# Altium PCB wizip20-io-v100.PcbDoc
Units mm, origin at the board's own origin, x right, y up, seen from the top; angles counter-clockwise.
Board outline 25.4 x 57.15 mm, 2 copper layers (Top Layer, Bottom Layer); 23 components, 24 nets, 91 pads, 53 vias.
Unrouted connection lines stored in the file: 9.
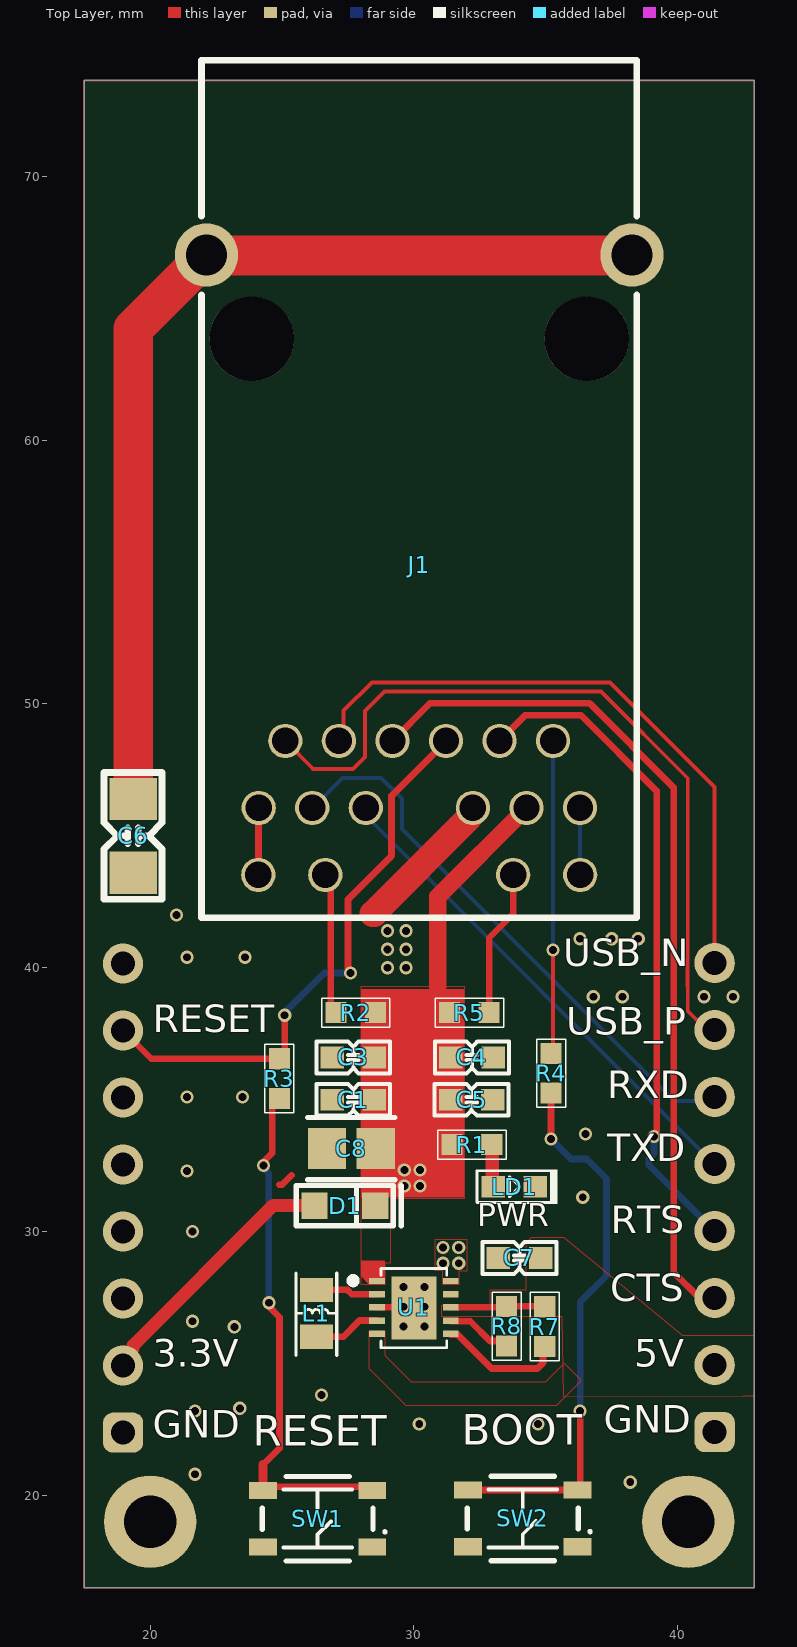
[diagram p0: Top Layer view]
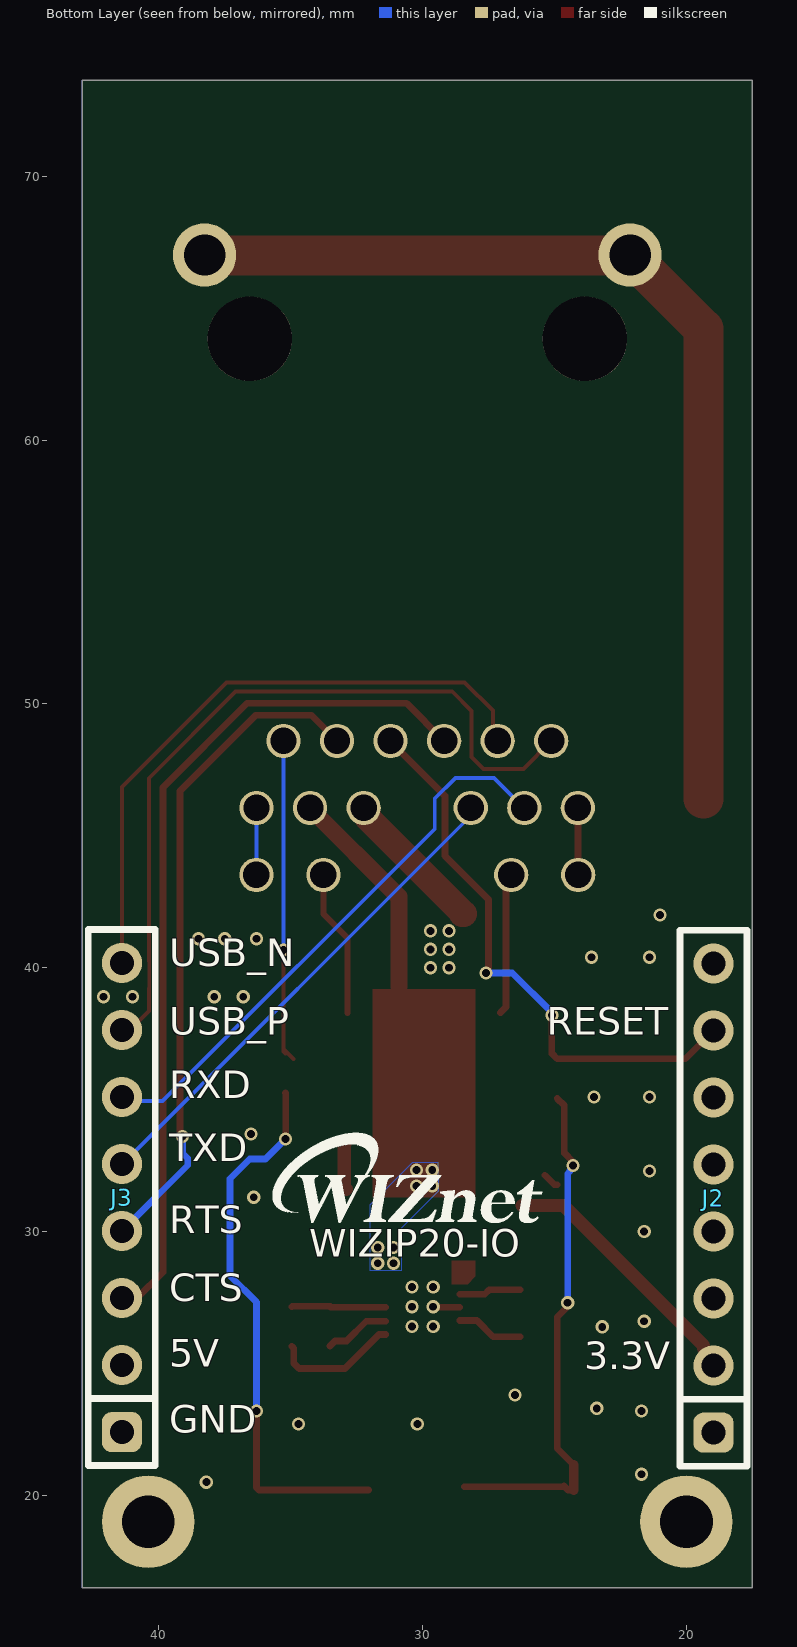
[diagram p1: Bottom Layer view, seen from below]
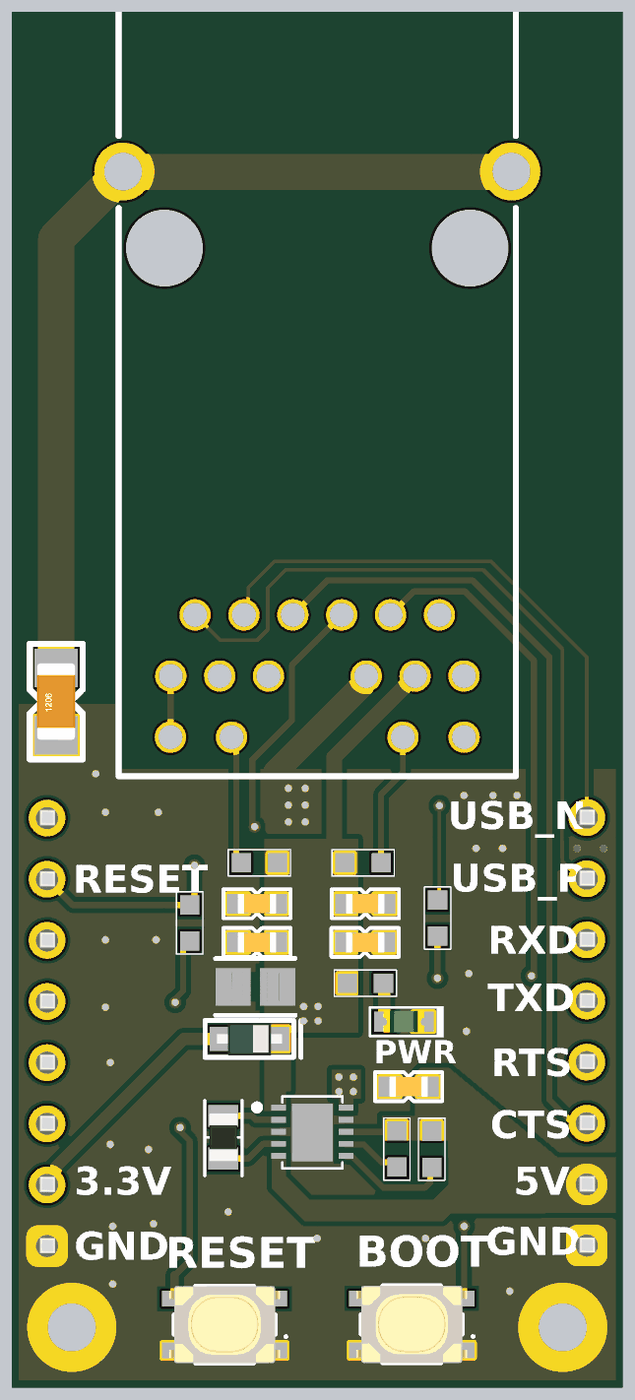
[diagram p2: 3D render of the assembled board from above, using the file's embedded part models]

## Layer stack, top to bottom
Top Solder: solder mask 0.0102, Solder Resist, Dk 3.5
Top Layer: signal copper 0.0356
Dielectric 1: dielectric 0.32, FR-4, Dk 4.8
Bottom Layer: signal copper 0.0356
Bottom Solder: solder mask 0.0102, Solder Resist, Dk 3.5

## Board outline
17.5,16.5 17.5,73.65 42.9,73.65 42.9,16.5

## Design rules (kind name [scope] priority, off if disabled: settings)
BoardOutlineClearance [All] p1: gap=0.3 ignorepadtopadclearanceinfootprint=FALSE except(0: Track-OutlineEdge)
Clearance [All] p1: gap=0.2 ignorepadtopadclearanceinfootprint=FALSE
HoleSize [All] p1: absolutevalues=TRUE maxlimit=3.3 minlimit=0.025 maxpercent=80.000 minpercent=20.000
PlaneConnect [All] p1: planeconnectstyle=Direct reliefexpansion=0.508 reliefentries=4 reliefconductorwidth=0.254 reliefairgap=0.254
PolygonConnect [All] p1: connectstyle=Direct reliefconductorwidth=0.35 reliefentries=4 polygonreliefangle="90 Angle" airgapwidth=0.254
RoutingCorners [All] p1: cornerstyle=45-Degree minsetback=2 maxsetback=2
RoutingVias [All] p1: holewidth=0.3 width=0.45 viastyle="Through Hole" minholewidth=0.15 minwidth=0.4 maxholewidth=0.5 maxwidth=1
SilkToSilkClearance [All] p1: silktosilkclearance=0.15
SilkToSolderMaskClearance [IsPad] p1: minsilkscreentomaskgap=0.05 clearancetoexposedcopper=TRUE
SolderMaskExpansion [All] p1: expansion=0.102 istentingtop=FALSE
SupplyNets "Schematic Supply Nets_2" [InNet('5V')] p1: voltage=0.000
SupplyNets "Schematic Supply Nets_1" [InNet('3V3')] p2: voltage=0.000
SupplyNets "Schematic Supply Nets" [InNet('GND')] p3: voltage=0.000
Width [All] p1: maxlimit=1.5 minlimit=0.15 preferedwidth=0.2 minimp=50.000000 maximp=50.000000 favimp=50.000000
25 further rules are at their usual default settings.

## Components (designator, comment, footprint, x,y, rotation, side; value= is the part's Value field where it differs from the comment)
C1 "10uF" CAP-0603 27.7,34.993 r0 top
C3 "1uF" CAP-0603 27.7,36.6 r0 top
C4 "0.1uF" CAP-0603 32.2,36.6 r180 top
C5 "0.1uF" CAP-0603 32.187,34.993 r180 top
C6 "1nF/2kV" CAP-1206 19.352,45 r90 top
C7 "10u" CAP-0603 34,29 r0 top
C8 "47u" CAP-0805 27.629,33.145 r0 top
D1 "BAT60A" SOD-323(1-C,2-A) 27.378,30.983 r180 top
J1 "WIZ-IP20" WIZ-IP20 30.2,48.6 r0 top
J2 "2.54mm 1x9 Pin Header DIP" IDC-1X8 18.974,22.377 r90 bottom
J3 "2.54mm 1x9 Pin Header DIP" IDC-1X8 41.4,22.4 r90 bottom
L1 "2u2" IND-0805 26.3,26.9 r90 top
LD1 "Green" LED-0603-GREEN 33.8,31.7 r0 top
R1 "470R" RES-0603 32.2,33.3 r180 top
R2 "330R" RES-0603 27.8,38.3 r180 top
R3 "1K" RES-0603 24.9,35.8 r90 top
R4 "1K" RES-0603 35.2,36 r90 top
R5 "330R" RES-0603 32.1,38.3 r0 top
R7 "100K" RES-0603 34.958,26.4 r270 top
R8 "100K" RES-0603 33.51,26.413 r270 top
SW1 "ITS-1105" 1188 26.35,19.116 r180 top
SW2 "ITS-1105" 1188 34.125,19.125 r180 top
U1 "SGM62112-3.3" SGM62112 30,27.1 r0 top

## Footprints (in the part's own frame and the unit in brackets; to place one, negate y for a bottom-side part, rotate by r counter-clockwise, add the part's x,y. Pads: shape width x height; smd on the part's side, far side on the other; paste and mask are expansions set on the pad)
1188 [mm]
  rect 1.05x0.65 smd: 1(-2.075,1.075) 2(2.075,1.075) 3(-2.075,-1.075) 4(2.075,-1.075)
  silkscreen extent -2.6,-1.6 2.1,1.6, body extent -2.3,-1.6 2.3,1.6, height 2.53
CAP-0603 [mm] "Ceramic CAP 0603(1608)"
  rect 0.89x0.82 smd: 1(-0.8,0) 2(0.8,0)
  silkscreen extent -1.4,-0.6 1.4,0.6, body extent -0.93,-0.41 0.93,0.41, height 0.81
CAP-0805 [mm] "Ceramic CAP 0603(1608)"
  rect 1.455x1.556 smd paste+0 mask+0: 1(-0.926,0) 2(0.926,0)
  silkscreen extent -1.65,-1.18 1.65,1.18, body extent -2.15,-1.28 2.15,1.28, height 0.25
CAP-1206 [mm]
  rect 1.6x1.8 smd: 1(-1.4,0) 2(1.4,0)
  silkscreen extent -2.4,-1.1 2.4,1.1, body extent -1.6,-0.8 1.6,0.8, height 1
IDC-1X8 [mil]
  rrect50% 60x60 hole 36: 1(0,0)
  round 60 hole 36: 2(100,0) 3(200,0) 4(300,0) 5(400,0) 6(500,0) 7(600,0) 8(700,0)
  silkscreen extent -50,-50 750,50, body extent -49,-49 751,51, height 336
IND-0805 [mil]
  rect 36x49 smd: 1(-35,0)
  rect 35.43x49 smd: 2(35,0)
  Top Layer pour cut-out: -15,24.04 -15,-25.96 15,-25.96 15,24.04
  silkscreen extent -63,-30 60,30, body extent -39,-24 39,24, height 37
LED-0603-GREEN [mm] "LED-0603-GREEN"
  rect 0.89x0.82 smd: 1(-0.8,0) 2(0.8,0)
  silkscreen extent -1.41,-0.65 1.65,0.65, body extent -0.85,-0.45 0.85,0.45, height 0.9
RES-0603 [mm] "Chip Resistor, 2-Leads, Body 1.60x0.80mm, IPC High Density"
  rect 0.8x0.8 smd paste+0 mask+0.102: 1(-0.75,0) 2(0.75,0)
  silkscreen extent -1.29,-0.55 1.3,0.55, body extent -0.85,-0.45 0.85,0.45, height 0.55
SGM62112 [mm]
  rect 0.6x0.24 smd paste+0 mask+0: 1(-1.406,1.025) 2(-1.406,0.525) 3(-1.406,0.025) 4(-1.406,-0.475) 5(-1.406,-0.975) 6(1.394,-0.975) 7(1.394,-0.475) 8(1.394,0.025) 9(1.394,0.525) 10(1.394,1.025)
  rect 1.7x2.4 smd paste+0 mask+0: 9(0,0)
  silkscreen extent -2.43,-1.5 1.25,1.5
SOD-323(1-C,2-A) [mm]
  rect 1x1 smd: 1(-1.15,0) 2(1.15,0)
  silkscreen extent -2.15,-0.76 1.84,0.76, body extent -1.35,-0.67 1.35,0.68, height 0.79
WIZ-IP20 [mm] "WIZ-IP20/WIZ-IP32"
  round 1.3 hole 1: L1(-6.1,-5.08) L2(-3.56,-5.08) L3(3.56,-5.08) L4(6.1,-5.08) P1(-6.085,-2.54) P2(-5.075,0) P3(-4.055,-2.54) P4(-3.045,0) P5(-2.025,-2.54) P6(-1.015,0) P8(1.015,0) P9(2.035,-2.54) P10(3.045,0) P11(4.065,-2.54) P12(5.075,0) P13(6.095,-2.54)
  round 2.4 hole 1.57: SHILD1(-8.065,18.42) SHILD2(8.065,18.42)
  round 3.2 hole 3.2 unplated: ""(-6.35,15.24) ""(6.35,15.24)
  silkscreen extent -8.25,-6.7 8.25,25.8, body extent -7.6,4.33 7.4,17.4, height 13.4

## Part data
C1 C3 C4 C5: library part CAP-0603, "MLCC-0603(1608)"
C6: library part CAP-0603, "MLCC-1206"
C7 C8: library part CAP-0805, "MLCC-0805(2012)"
D1: library part "DIODE-Shottky (SOD-323)", "Silicon Schottky Diode"
J2 J3: library part "2.54mm 1x8 Pin Header DIP"
L1: library part IND-0805, "Inductor 0805(2012)"
LD1: library part LED-0603, "LED-0603"
R1 R2 R3 R4 R5: library part RES-0603, "Chip Resistor 0603(1608)", Case Code (Imperial)=0603, Case Code (Metric)=1608, Manufacturer=Yageo, Max Operating Temperature=155degC, Max Power Dissipation=100mW, Min Operating Temperature=-55degC, Package Description="2-Pin Surface Mount Device, Body 1.6 x 0.8 mm", Package Quantity=1, Resistance=1.5KOhm, Temperature Coefficient=100ppm/degreesC, Tolerance=1%, Voltage Rating=50V, Case/Package=0603, Composition=ThickFilm, Datasheet URL=http://www.yageo.com/NewPortal/yageodocoutput?fileName=/pdf/R-Chip/PYu-RC_Group_51_RoHS_L_5.pdf, Datasheet Version="Rev. 5, 10/2016", Depth=0.8mm, Height=0.022inch, Lead Free=LeadFree, Length=0.063inch, Manufacturer URL=http://www.yageo.com/, Military Standard=Not, Number of Pins=2, Number of Terminations=2, Package Reference=0603, Packaging=TapeandReel, Power Rating=100mW, REACH SVHC=NoSVHC, RoHSCompliant=true, Termination=SMD/SMT, Voltage Rating (DC)=50V, Width=0.031inch
R7 R8: library part RES-0402, "RES-0402"
SW1 SW2: "TACT Switch (SMD)"
U1: "Buck-Boost Switching Regulator IC Positive Adjustable 1.8V 1 Output 800mA 10-WFDFN Exposed Pad", Package="WFDFN-10 Richtek", Digi-Key_Part_Number=1028-1259-1-ND, Digi-Key_Purchase_URL=https://www.digikey.com/product-detail/en/richtek-usa-inc/RT6150AGQW/1028-1259-1-ND/4733181?utm_source=snapeda&utm_medium=aggregator&utm_campaign=symbol, MF="Richtek USA", MP=RT6150AGQW, SnapEDA_Link=https://www.snapeda.com/parts/RT6150AGQW/Richtek%20USA%20Inc./view-part/1219544/?ref=snap

## Free pads (board coordinates)
  round 3.5 hole 2: 2(40.4,19) 3(20,19)

## Via types
v1: diameter 0.5, hole 0.3, Top Layer to Bottom Layer, tented both sides, 53 vias

## Nets (pads, with @x,y where several pads share a name; then routed paths per layer and width w, separated by ;. In a path a pad name is that pad's centre, name@x,y a point inside that pad or via, vN(x,y) a via of type N, cw(c..) or ccw(c..) an arc to the next point about the centre after c; other vN are vias at no path point)
3V3: C1.2 C3.2 C4.2 C5.2 C8.2 D1.1 J1.P11 R1.2 R2.1 R5.1 U1.1 U1.10 | length 8.2
  Top Layer w0.65: 30.9,39.3 30.9,42.695 J1.P11
  Bottom Layer w0.508: J1.P11@34.265,45.945 J1.P11@34.265,46.04
  other v1: 31.1,28.8 31.7,28.8 31.1,29.4 31.7,29.4 29.635,31.731 30.235,31.731 29.635,32.331 30.235,32.331
5V: C7.2 J3.2 R7.1 R8.1 U1.5 U1.8 | length 3.6
  Top Layer w0.25: U1.8 33.472,27.125 R8.1 34.945,27.163 R7.1
ACT_LED: J1.L1 J1.P1 | length 2.6
  Top Layer w0.254: J1.L1@24.1,43.48 J1.L1@24.108,43.488 ; J1.L1@24.1,43.5 24.108,43.507 24.108,46.033 J1.P1@24.115,46.04 ; J1.P1@24.108,46.013 J1.P1@24.115,46.02
BOOT: J1.P12 R4.2 | length 12.4
  Top Layer w0.15: R4.2@34.9,36.55 R4.2@35.275,36.925 ; R4.2 35.275,36.825 v1(35.275,40.675)
  Bottom Layer w0.15: v1(35.275,40.675) J1.P12@35.275,48.58
CTS: J1.P6 J3.3 | length 32.9
  Top Layer w0.254: J1.P6 30.616,50.031 36.649,50.031 39.844,46.835 39.844,28.456 40.82,27.48 J3.3
  Bottom Layer w0.254: J1.P6@29.185,48.58 J1.P6@29.206,48.559
GND: C1.1 C3.1 C4.1 C5.1 C6.1 C7.1 C8.1 J1.P9 J2.1 J3.1 LD1.2 pad.2 pad.3 SW1.1 SW1.2 SW2.1 SW2.2 U1.3 U1.9 | length 7.3
  Top Layer w0.25: 24.9,31.775 25,31.775 25.363,32.137 ; U1.3 29.575,27.125 v1(29.6,27.15)
  Top Layer w1: 28.5,42.042 28.442,42.042 32.085,45.685 32.085,45.809 32.235,45.959 J1.P9@32.235,46.04
  other v1: 38.2,20.5 21.7,20.8 30.2,22.7 34.7,22.7 21.7,23.2 23.4,23.3 26.5,23.8 23.19,26.39 29.6,26.4 30.4,26.4 21.6,26.6 30.4,27.15 29.6,27.9 30.4,27.9 21.6,30 36.4,31.3 21.4,32.3 36.5,33.7 21.4,35.1 23.5,35.1 36.8,38.9 37.9,38.9 41,38.9 42.1,38.9 29,40 29.7,40 21.4,40.4 23.6,40.4 29,40.7 29.7,40.7 36.3,41.1 37.5,41.1 38.5,41.1 29,41.4 29.7,41.4 21,42
LED2+: J1.L3 R5.2 | length 6.2
  Top Layer w0.24: R5.2 32.85,41.138 33.76,42.048 J1.L3@33.76,43.26
  Top Layer w0.254: J1.L3@33.76,43.5 J1.L3@33.76,43.48 ; J1.L3@33.76,43.48 33.76,43.26 33.9,43.4 33.84,43.4 J1.L3@33.76,43.48
  Bottom Layer w0.254: J1.L3@33.76,43.217 J1.L3@33.76,43.5
"LINK LED": J1.L4 J1.P13 | length 2.5
  Top Layer w0.254: J1.P13@36.295,46.04 J1.P13@36.297,46.038 ; J1.L4@36.297,43.503 J1.L4@36.3,43.5
  Bottom Layer w0.15: J1.P13@36.295,46.04 36.297,46.038 36.297,43.503 J1.L4@36.3,43.5
NetC6_2: C6.2 J1.SHILD1 J1.SHILD2 | length 37.9
  Top Layer w1.5: C6.2 19.352,48.318 19.352,64.217 22.135,67 J1.SHILD2@38.265,67
NetD1_2: D1.2 J2.2 | length 10
  Top Layer w0.5: J2.2 18.974,25.194 19.35,25.571 19.35,25.68 24.654,30.983 D1.2
NetJ1_L2: J1.L2 R2.2 | length 5.4
  Top Layer w0.254: J1.L2@26.64,43.5 26.64,43.217 26.841,43.016 26.841,38.509 R2.2
NetL1_1: L1.1 U1.4 | length 2.5
  Top Layer w0.254: L1.1 27.328,26.011 27.942,26.625 U1.4
NetL1_2: L1.2 U1.2 | length 2.4
  Top Layer w0.254: L1.2 27.479,27.789 27.642,27.625 U1.2
NetLD1_1: LD1.1 R1.1 | length 1.7
  Top Layer w0.508: LD1.1@32.9,31.6 32.975,31.675 32.975,33.275 R1.1
NetR3_1: R3.1 SW1.3 SW1.4 | length 19.8
  Top Layer w0.254: SW1.4 24.475,20.191 SW1.4@24.641,20.357 ; 24.275,21.159 24.9,21.784 24.9,26.752 24.5,27.152 v1(24.5,27.3) ; v1(24.3,32.5) 24.3,32.648 24.627,32.975 24.627,34.777 R3.1 ; SW1.4@24.673,20.325 SW1.3@28.425,20.325
  Top Layer w0.354: SW1.4 24.275,21.159
  Bottom Layer w0.254: v1(24.3,32.5) 24.3,32.433 24.423,32.31 24.423,32.273 24.5,32.196 v1(24.5,27.3)
NetR4_1: R4.1 SW2.3 SW2.4 | length 20.8
  Top Layer w0.254: SW2.4 SW2.3@36.119,20.2 ; v1(35.192,33.508) 35.192,35.242 R4.1 ; SW2.3 36.3,20.3 v1(36.3,23.2)
  Bottom Layer w0.254: v1(35.192,33.508) 35.952,32.748 36.552,32.748 37.3,32 37.3,28.324 36.3,27.324 v1(36.3,23.2)
NetR7_2: R7.2 U1.6 | length 4.8
  Top Layer w0.254: U1.6@31.4,26.1 31.651,26.1 32.944,24.806 34.679,24.806 34.89,25.018 34.89,25.582 R7.2
NetR8_2: R8.2 U1.7 | length 2.5
  Top Layer w0.25: U1.7@31.4,26.6 32.134,26.6 32.882,25.853 33.321,25.853 R8.2
RESET: J1.P8 J2.7 R3.2 | length 21.7
  Top Layer w0.254: J2.7 20.041,36.55 24.8,36.55 R3.2 25.1,36.75 v1(25.1,38.2) ; v1(27.6,39.8) 27.5,39.9 27.5,42.589 29.152,44.241 29.152,46.517 J1.P8@31.215,48.58 ; J1.P8@31.204,48.549 J1.P8@31.215,48.56
  Bottom Layer w0.254: v1(25.1,38.2) 25.1,38.3 26.6,39.8 v1(27.6,39.8)
RTS: J1.P10 J3.4 | length 25.5
  Top Layer w0.254: J1.P10 34.222,49.577 36.323,49.577 39.2,46.7 39.2,33.7 v1(39.1,33.6)
  Bottom Layer w0.254: J1.P10@33.086,48.58 J1.P10@33.245,48.58 ; v1(39.1,33.6) 39.1,32.965 38.904,32.77 38.904,32.516 J3.4
RXD: J1.P3 J3.6 | length 22.1
  Top Layer w0.15: J1.P3@26.145,46.04 J1.P3@26.308,45.877
  Bottom Layer w0.15: J1.P3@26.145,46.04 27.298,47.193 28.759,47.193 29.54,46.412 29.54,45.263 39.853,34.95 J3.6@41.001,34.95 ; J3.6@41.001,34.95 41.249,34.95 J3.6@41.001,34.95
  Bottom Layer w0.254: J1.P3@26.145,45.757 J1.P3@26.145,46.04
TXD: J1.P5 J3.5 | length 19.3
  Top Layer w0.254: J1.P5@28.175,46.04 J1.P5@28.372,45.843
  Bottom Layer w0.15: J1.P5@28.175,46.04 28.175,45.762 41.249,32.688 J3.5@41.249,32.41
USB_N: J1.P4 J3.8 | length 24.1
  Top Layer w0.15: J1.P4@27.155,48.58 27.335,48.76 27.335,49.746 28.409,50.821 37.432,50.821 41.4,46.853 J3.8
USB_P: J1.P2 J3.7 | length 29.7
  Top Layer w0.15: J1.P2@25.1,48.6 J1.P2 26.182,47.543 27.697,47.543 28.143,47.99 28.143,49.738 28.876,50.471 37.093,50.471 40.379,47.184 40.379,40.363 ccw(c41.4,40.18) 40.363,40.17 40.379,38.36 J3.7@41.249,37.49 ; J1.P2@25.125,48.58 J1.P2@25.456,48.58
pads on no net: J1. J2.3 J2.4 J2.5 J2.6 J2.8

## Polygon pours and split planes (outlines as drawn)
3V3 on Top Layer "NONET_L01_P013" (solid, shelved, pour order 13): 31.1,27.98 31.1,28.515 30.8,28.515 30.8,29.7 32,29.7 32,28.5 31.7,28.5 31.7,27.98
3V3 on Top Layer "NONET_L01_P041" (solid, shelved, pour order 41): 28.894,27.98 28.011,27.98 28,27.991 28,39.3 31.9,39.3 31.9,31.245 29.1,31.245 29.1,28.8 28.9,28.8
5V on Top Layer "NONET_L01_P056" (solid, shelved, pour order 56): 28.3,26.22 28.898,26.22 28.898,25.302 29.9,24.3 35,24.3 35.7,25 36.3,24.4 36.3,24.3 35.4,23.4 29.7,23.4 28.3,24.8
5V on Top Layer "5V_L01_P041" (solid, shelved, pour order 66): 35.671,23.729 35.63,26.763 31.047,26.763 31.047,27.2 32.885,27.2 32.885,27.787 34.251,27.787 34.251,29.564 34.471,29.784 35.671,29.784 40.177,26.072 42.907,26.072 42.907,24.02 42.907,23.754 42.477,23.754
GND on Top Layer "NONET_L01_P067" (solid, shelved, pour order 67): 17.488,16.481 17.488,73.635 17.498,73.645 17.515,73.627 42.89,73.627 42.89,16.483 42.888,16.481
3V3 on Bottom Layer "NONET_L02_P065" (solid, shelved, pour order 65): 29.4,32.6 30.4,32.6 32,31 32,28.534 30.8,28.534 30.8,30.145 29.394,31.551
GND on Bottom Layer "NONET_L02_P069" (solid, shelved, pour order 69): 17.5,73.65 17.5,16.5 42.9,16.5 42.9,73.65

## Other copper
Top Layer:
  rectangle net 3V3: 28,31.3 31.9,39.2
  region net 3V3: 28.894,28.005 28.9,28.011 28.9,28.9 28,28.9 28,28.299 28.294,28.005
  pour cut-out: 21.969,45.056 21.969,42.192 42.9,42.192 42.9,45.196 42.794,45.09 21.95,45.09
  pour cut-out: 17.428,73.657 17.428,45.082 17.469,45.041 42.788,45.041 42.788,73.445 42.575,73.657 42.828,73.657
  pour cut-out: 31.073,26.986 31.073,26.742 32.96,26.742 32.96,26.988
Bottom Layer:
  pour cut-out: 21.95,44.924 21.95,41.9 42.876,41.782 42.9,41.806 42.9,45.075
  pour cut-out: 17.5,73.65 17.5,44.868 42.9,44.868 42.9,73.65

## Silkscreen, mask and mechanical layers (free items; w line width, h text height)
Top Overlay:
  text "USB_N" at 35.668,39.7 h1.8
  text "RESET" at 20.1,37.2 h1.8
  text "USB_P" at 35.771,37.1 h1.8
  text "RXD" at 37.332,34.7 h1.8
  text "TXD" at 37.336,32.3 h1.8
  text "PWR" at 32.4,29.9 h1.5
  text "RTS" at 37.469,29.577 h1.8
  text "CTS" at 37.432,27 h1.8
  text "3.3V" at 20.1,24.515 h1.8
  text "5V" at 38.357,24.515 h1.8
  text "GND" at 37.2,22.015 h1.8
  text "GND" at 20.1,21.815 h1.8
  text "BOOT" at 31.813,21.527 h2
  text "RESET" at 23.889,21.476 h2
Bottom Overlay:
  drawing of 6 lines, arcs and shapes, not listed
  text "USB_N" at 39.6,39.7 h1.8
  text "RESET" at 25.3,37.1 h1.8
  text "USB_P" at 39.6,37.1 h1.8
  text "RXD" at 39.6,34.7 h1.8
  text "TXD" at 39.6,32.3 h1.8
  text "RTS" at 39.6,29.577 h1.8
  text "WIZIP20-IO" at 34.3,28.678 h1.8
  text "CTS" at 39.6,27 h1.8
  text "5V" at 39.6,24.515 h1.8
  text "3.3V" at 23.875,24.415 h1.8
  text "GND" at 39.6,22.015 h1.8